# Altium PCB 100885.pcbdoc (part 1 of 3)
Units mm, origin at the board's own origin, x right, y up, seen from the top; angles counter-clockwise.
Board outline 292.21 x 226.73 mm, 2 copper layers (Top Layer, Bottom Layer), stack 0.091 mm thick; 33 components, 69 nets, 230 pads, 87 vias.
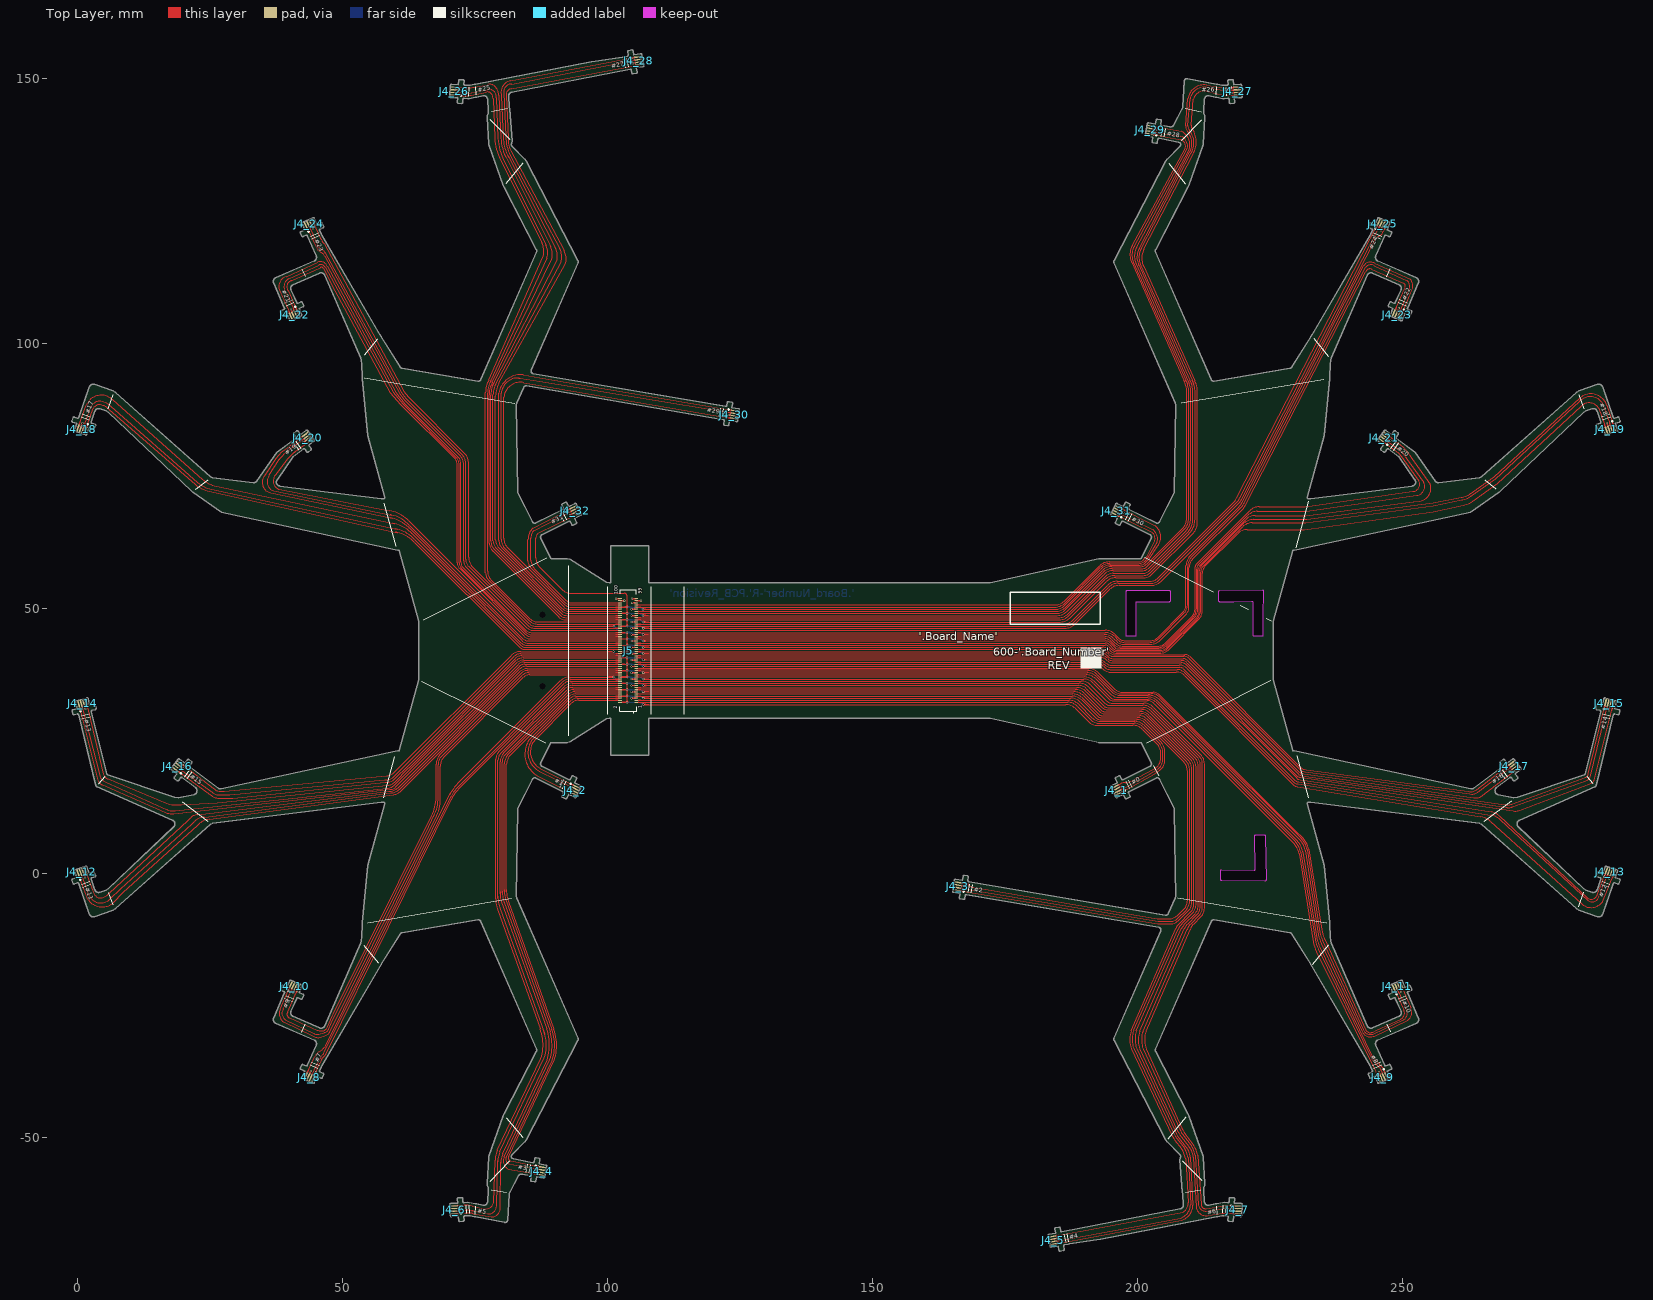
[diagram p0: Top Layer view]
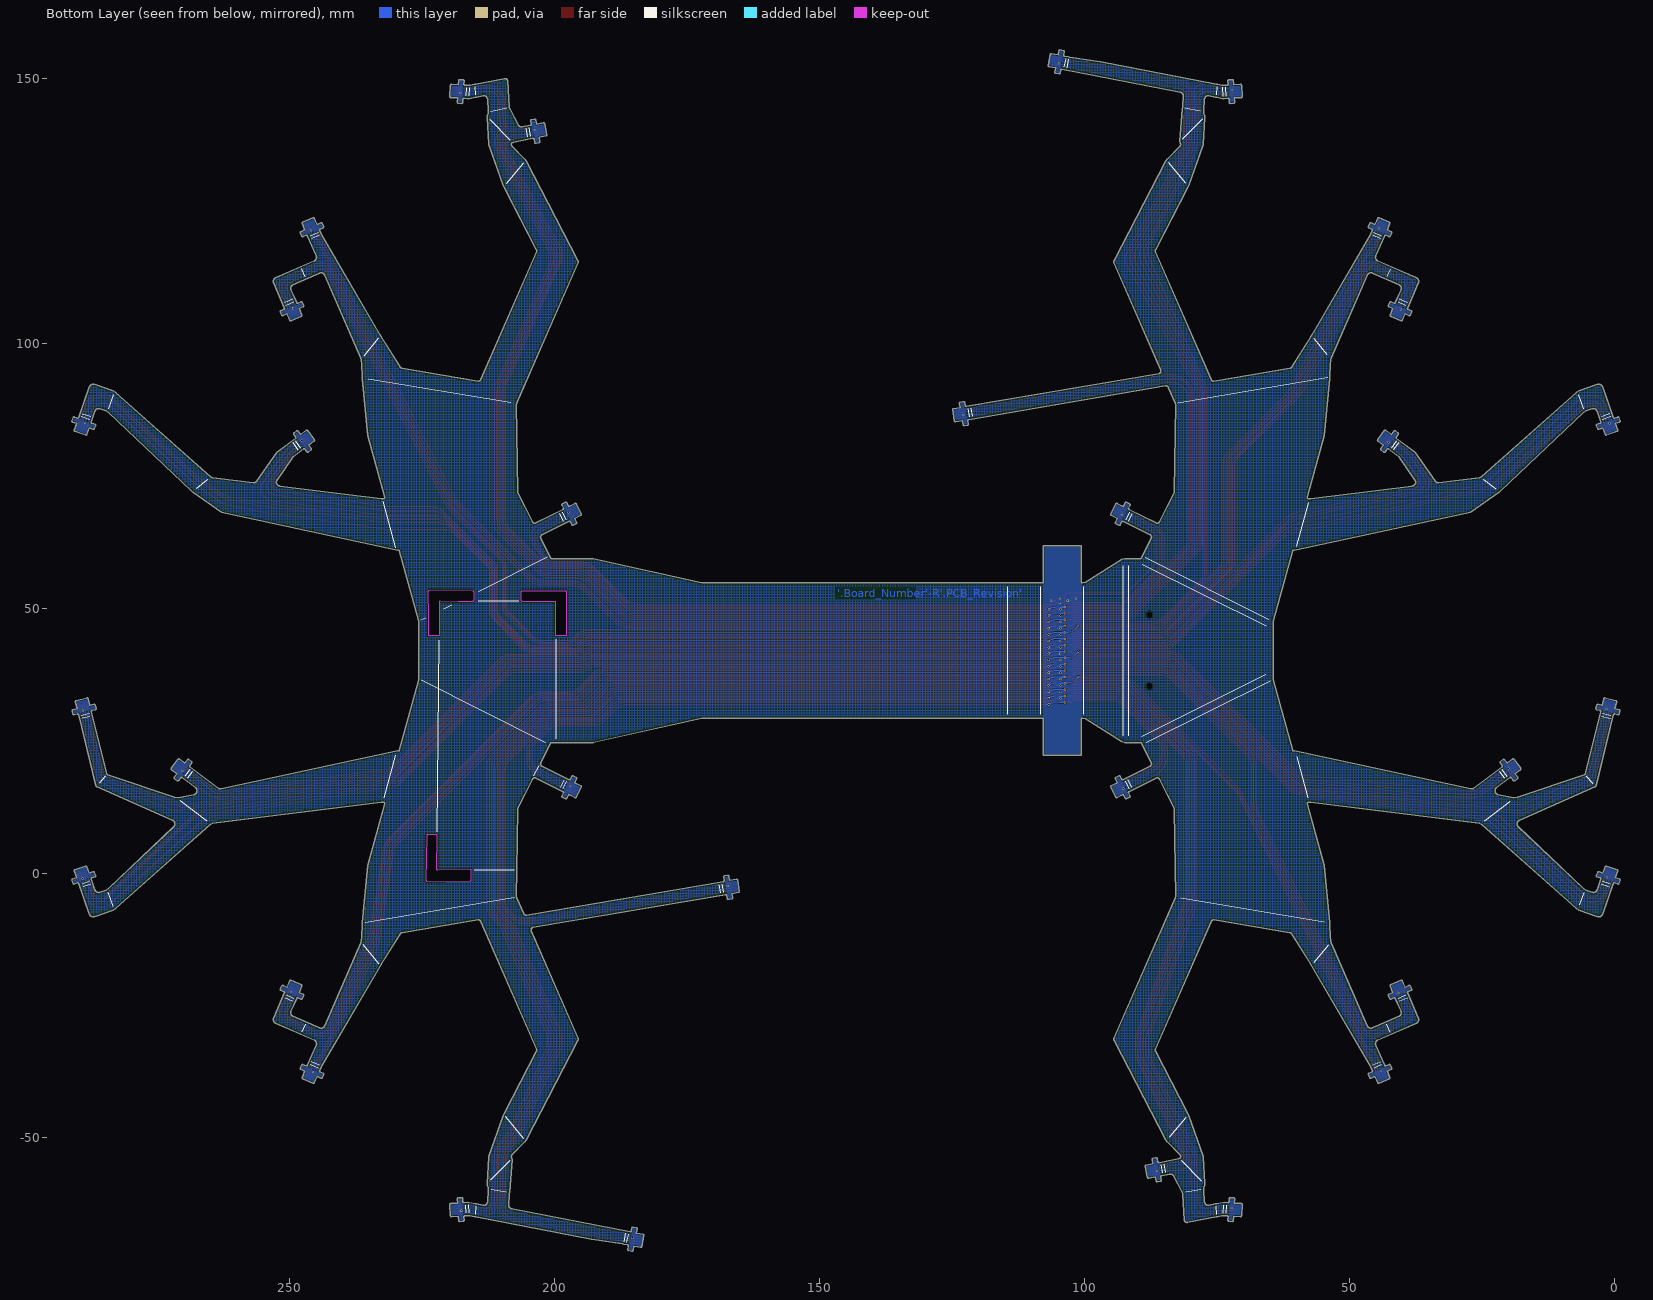
[diagram p1: Bottom Layer view, seen from below]

## Layer stack, top to bottom
Top Solder: solder mask 0.0102, Solder Resist, Dk 3.5
Top Layer: signal copper 0.0356
Dielectric 1: core 0.02, FR-4, Dk 4.2
Bottom Layer: signal copper 0.0356
Bottom Solder: solder mask 0.0102, Solder Resist, Dk 3.5

## Board outline
1384 vertices, not listed, extent -1.127,-71.353 291.087,155.374
cut-out: 197.765,44.961 ccw(c197.965,44.961) 197.965,44.761 199.565,44.761 ccw(c199.565,44.961) 199.765,44.961 199.765,51.061 cw(c199.965,51.061) 199.965,51.261 206.065,51.261 ccw(c206.065,51.461) 206.265,51.461 206.265,53.061 ccw(c206.065,53.061) 206.065,53.261 197.965,53.261 ccw(c197.965,53.061) 197.765,53.061
cut-out: 215.465,51.261 217.855,51.261 218.197,51.262 221.585,51.308 cw(c221.588,51.108) 221.788,51.105 221.766,49.478 221.765,49.305 221.765,44.961 ccw(c221.965,44.961) 221.965,44.761 223.565,44.761 ccw(c223.565,44.961) 223.765,44.961 223.765,48.305 223.766,48.478 223.829,53.187 ccw(c223.629,53.19) 223.626,53.39 215.468,53.279 ccw(c215.471,53.079) 215.271,53.082 215.266,52.728 215.265,52.555 215.265,51.461 ccw(c215.465,51.461)
cut-out: 215.698,-1.216 215.676,0.438 cw(c215.876,0.441) 215.879,0.641 222.013,0.558 ccw(c222.015,0.758) 222.215,0.76 222.132,7.027 cw(c222.332,7.03) 222.335,7.23 223.948,7.208 cw(c223.945,7.008) 224.145,7.011 224.256,-1.322 cw(c224.056,-1.324) 224.054,-1.524 215.896,-1.413 cw(c215.898,-1.213)

## Design rules (kind name [scope] priority, off if disabled: settings)
AssemblyTestPointUsage [All] p1 off:
AssemblyTestpoint [All] p1 off: testpointundercomponent=TRUE minsize=1.016 maxsize=2.54 preferedsize=1.524 minholesize=0 maxholesize=1.016 preferedholesize=0.813 testpointgrid=0.025 usegrid=TRUE gridtolerance=0 allowsidetop=TRUE allowsidebottom=TRUE
BoardOutlineClearance bottom_copper_regions [OnLayer('Bottom Layer')] p1: gap=0.25 except(0: Region-OutlineEdge Text-OutlineEdge)
BoardOutlineClearance silkscreen [(OnTopSilkscreen or OnBottomSilkscreen) and IsFree] p2: gap=0.3 except(0: Text-OutlineEdge)
BoardOutlineClearance Connectors [HasFootprint('WATCHMAN_CUSTOM_ZIF_4_PADS')] p3: gap=0
BoardOutlineClearance PSA [onlayer('PSA')] p4: gap=0
BoardOutlineClearance Stiffener [OnLayer('Stiffener')] p5: gap=0
BoardOutlineClearance Stiffener_1 [OnLayer('FAB_LOCATIONS')] p6: gap=0
BoardOutlineClearance BoardOutlineClearance_1 [All] p7: gap=0.25 except(0: Text-OutlineEdge)
Clearance Cutout [All vs OnLayer('PSA')] p1: gap=0
Clearance [All] p2: gap=0.125 except(0: Arc-Region Track-Region SMDPad-Region THPad-Region Via-Region Fill-Region Region-Region)
ComponentClearance [All] p1: gap=0.18 collisioncheckmode=3 verticalgap=0.18 showdistances=FALSE
FabricationTestPointUsage [All] p1 off: valid=0 allowmultiple=FALSE
FabricationTestpoint [All] p1 off: side=3 testpointundercomponent=TRUE minsize=1.016 maxsize=2.54 preferedsize=1.524 minholesize=0 maxholesize=1.016 preferedholesize=0.813 testpointgrid=0.025 allowsidetop=TRUE allowsidebottom=TRUE usegrid=TRUE gridtolerance=0
HoleSize [All] p1: absolutevalues=TRUE maxlimit=2.7 minlimit=0.025 maxpercent=80.000 minpercent=20.000
MinimumSolderMaskSliver MinimumSolderMaskSliver_1 [isvia vs IsPad] p1: minsoldermaskwidth=0
MinimumSolderMaskSliver [All] p2: minsoldermaskwidth=0.05
PlaneClearance [All] p1: clearance=0.2
PlaneConnect [All] p1: planeconnectstyle=Direct reliefexpansion=0.508 reliefentries=4 reliefconductorwidth=0.254 reliefairgap=0.254
PolygonConnect MTG [HasFootprint('MTG197RD102P')] p1: connectstyle=Direct reliefconductorwidth=0.25 reliefentries=4 polygonreliefangle="90 Angle" airgapwidth=0.125
PolygonConnect POLY_VIA [IsVia vs IsPolygon] p2: connectstyle=Direct reliefconductorwidth=0.254 reliefentries=4 polygonreliefangle="90 Angle" airgapwidth=0.254
PolygonConnect PolygonConnect_1 [All] p3: connectstyle=Relief reliefconductorwidth=0.25 reliefentries=4 polygonreliefangle="90 Angle" airgapwidth=0.125
RoomDefinition U_SensorConn432 [InComponentClass('U_SensorConn432')] p1: confinementstyle=ConfineIn formatcopy=TRUE lockcomponents=FALSE outline 145.778,432.283 155.778,432.283 155.778,446.283 145.778,446.283
RoomDefinition U_SensorConn431 [InComponentClass('U_SensorConn431')] p2: confinementstyle=ConfineIn formatcopy=TRUE lockcomponents=FALSE outline 145.778,417.283 154.778,417.283 154.778,431.283 145.778,431.283
RoomDefinition U_SensorConn430 [InComponentClass('U_SensorConn430')] p3: confinementstyle=ConfineIn formatcopy=TRUE lockcomponents=FALSE outline 145.778,401.283 155.778,401.283 155.778,415.283 145.778,415.283
RoomDefinition U_SensorConn429 [InComponentClass('U_SensorConn429')] p4: confinementstyle=ConfineIn formatcopy=TRUE lockcomponents=FALSE outline 145.778,386.283 155.778,386.283 155.778,400.283 145.778,400.283
RoomDefinition U_SensorConn428 [InComponentClass('U_SensorConn428')] p5: confinementstyle=ConfineIn formatcopy=TRUE lockcomponents=FALSE outline 145.778,371.283 155.778,371.283 155.778,385.283 145.778,385.283
RoomDefinition U_SensorConn427 [InComponentClass('U_SensorConn427')] p6: confinementstyle=ConfineIn formatcopy=TRUE lockcomponents=FALSE outline 145.778,356.283 155.778,356.283 155.778,370.283 145.778,370.283
RoomDefinition U_SensorConn426 [InComponentClass('U_SensorConn426')] p7: confinementstyle=ConfineIn formatcopy=TRUE lockcomponents=FALSE outline 145.778,340.283 155.778,340.283 155.778,354.283 145.778,354.283
RoomDefinition U_SensorConn425 [InComponentClass('U_SensorConn425')] p8: confinementstyle=ConfineIn formatcopy=TRUE lockcomponents=FALSE outline 145.778,325.283 155.778,325.283 155.778,339.283 145.778,339.283
RoomDefinition U_SensorConn324 [InComponentClass('U_SensorConn324')] p9: confinementstyle=ConfineIn formatcopy=TRUE lockcomponents=FALSE outline 145.778,310.283 155.778,310.283 155.778,324.283 145.778,324.283
RoomDefinition U_SensorConn323 [InComponentClass('U_SensorConn323')] p10: confinementstyle=ConfineIn formatcopy=TRUE lockcomponents=FALSE outline 145.778,295.283 155.778,295.283 155.778,309.283 145.778,309.283
RoomDefinition U_SensorConn321 [InComponentClass('U_SensorConn321')] p11: confinementstyle=ConfineIn formatcopy=TRUE lockcomponents=FALSE outline 145.778,264.283 154.778,264.283 154.778,278.283 145.778,278.283
RoomDefinition U_SensorConn320 [InComponentClass('U_SensorConn320')] p12: confinementstyle=ConfineIn formatcopy=TRUE lockcomponents=FALSE outline 145.778,249.283 155.778,249.283 155.778,263.283 145.778,263.283
RoomDefinition U_SensorConn319 [InComponentClass('U_SensorConn319')] p13: confinementstyle=ConfineIn formatcopy=TRUE lockcomponents=FALSE outline 145.778,234.283 155.778,234.283 155.778,248.283 145.778,248.283
RoomDefinition U_SensorConn318 [InComponentClass('U_SensorConn318')] p14: confinementstyle=ConfineIn formatcopy=TRUE lockcomponents=FALSE outline 145.778,218.283 155.778,218.283 155.778,232.283 145.778,232.283
RoomDefinition U_SensorConn317 [InComponentClass('U_SensorConn317')] p15: confinementstyle=ConfineIn formatcopy=TRUE lockcomponents=FALSE outline 145.778,203.283 155.778,203.283 155.778,217.283 145.778,217.283
RoomDefinition U_SensorConn216 [InComponentClass('U_SensorConn216')] p16: confinementstyle=ConfineIn formatcopy=TRUE lockcomponents=FALSE outline 145.778,188.283 155.778,188.283 155.778,202.283 145.778,202.283
RoomDefinition U_SensorConn215 [InComponentClass('U_SensorConn215')] p17: confinementstyle=ConfineIn formatcopy=TRUE lockcomponents=FALSE outline 145.778,172.283 155.778,172.283 155.778,186.283 145.778,186.283
RoomDefinition U_SensorConn214 [InComponentClass('U_SensorConn214')] p18: confinementstyle=ConfineIn formatcopy=TRUE lockcomponents=FALSE outline 145.778,157.283 155.778,157.283 155.778,171.283 145.778,171.283
RoomDefinition U_SensorConn213 [InComponentClass('U_SensorConn213')] p19: confinementstyle=ConfineIn formatcopy=TRUE lockcomponents=FALSE outline 145.778,142.283 155.778,142.283 155.778,156.283 145.778,156.283
RoomDefinition U_SensorConn212 [InComponentClass('U_SensorConn212')] p20: confinementstyle=ConfineIn formatcopy=TRUE lockcomponents=FALSE outline 145.778,127.283 155.778,127.283 155.778,141.283 145.778,141.283
RoomDefinition U_SensorConn211 [InComponentClass('U_SensorConn211')] p21: confinementstyle=ConfineIn formatcopy=TRUE lockcomponents=FALSE outline 145.778,111.283 154.778,111.283 154.778,125.283 145.778,125.283
RoomDefinition U_SensorConn210 [InComponentClass('U_SensorConn210')] p22: confinementstyle=ConfineIn formatcopy=TRUE lockcomponents=FALSE outline 145.778,96.283 155.778,96.283 155.778,110.283 145.778,110.283
RoomDefinition U_SensorConn29 [InComponentClass('U_SensorConn29')] p23: confinementstyle=ConfineIn formatcopy=TRUE lockcomponents=FALSE outline 145.778,81.283 153.778,81.283 153.778,95.283 145.778,95.283
RoomDefinition U_SensorConn18 [InComponentClass('U_SensorConn18')] p24: confinementstyle=ConfineIn formatcopy=TRUE lockcomponents=FALSE outline 145.778,66.283 153.778,66.283 153.778,80.283 145.778,80.283
RoomDefinition U_SensorConn17 [InComponentClass('U_SensorConn17')] p25: confinementstyle=ConfineIn formatcopy=TRUE lockcomponents=FALSE outline 145.778,50.283 153.778,50.283 153.778,64.283 145.778,64.283
RoomDefinition U_SensorConn16 [InComponentClass('U_SensorConn16')] p26: confinementstyle=ConfineIn formatcopy=TRUE lockcomponents=FALSE outline 145.778,35.283 153.778,35.283 153.778,49.283 145.778,49.283
RoomDefinition U_SensorConn15 [InComponentClass('U_SensorConn15')] p27: confinementstyle=ConfineIn formatcopy=TRUE lockcomponents=FALSE outline 145.778,20.283 153.778,20.283 153.778,34.283 145.778,34.283
RoomDefinition U_SensorConn14 [InComponentClass('U_SensorConn14')] p28: confinementstyle=ConfineIn formatcopy=TRUE lockcomponents=FALSE outline 145.778,4.283 153.778,4.283 153.778,18.283 145.778,18.283
RoomDefinition U_SensorConn13 [InComponentClass('U_SensorConn13')] p29: confinementstyle=ConfineIn formatcopy=TRUE lockcomponents=FALSE outline 145.778,-10.717 153.778,-10.717 153.778,3.283 145.778,3.283
RoomDefinition U_SensorConn12 [InComponentClass('U_SensorConn12')] p30: confinementstyle=ConfineIn formatcopy=TRUE lockcomponents=FALSE outline 145.778,-25.717 153.778,-25.717 153.778,-11.717 145.778,-11.717
RoomDefinition U_SensorConn11 [InComponentClass('U_SensorConn11')] p31: confinementstyle=ConfineIn formatcopy=TRUE lockcomponents=FALSE outline 145.778,-40.717 153.778,-40.717 153.778,-26.717 145.778,-26.717
RoomDefinition SensorBreakout [InComponentClass('SensorBreakout')] p32: confinementstyle=ConfineIn formatcopy=TRUE lockcomponents=FALSE outline 146.778,-69.717 154.778,-69.717 154.778,-42.717 146.778,-42.717
RoomDefinition U_SensorConn322 [InComponentClass('U_SensorConn322')] p33: confinementstyle=ConfineIn formatcopy=TRUE lockcomponents=FALSE outline 61.276,-72.114 144.793,-72.114 144.793,-50.118 61.276,-50.118
RoutingCorners [All] p1: cornerstyle=45-Degree minsetback=0 maxsetback=0
RoutingVias [All] p1: holewidth=0.23 width=0.4 viastyle="Through Hole" minholewidth=0.23 minwidth=0.4 maxholewidth=0.23 maxwidth=0.4
SilkToSilkClearance [All] p1 off: silktosilkclearance=0.05
SilkToSolderMaskClearance [IsPad] p1: minsilkscreentomaskgap=0.125 clearancetoexposedcopper=TRUE
SolderMaskExpansion [All] p1: expansion=0.05
Width PWR_GND [InNetClass('PWR_GND')] p1: maxlimit=0.25 minlimit=0.25 preferedwidth=0.25
Width CRITICAL [InNetClass('MOTOR_DRIVERS')] p2: maxlimit=0.4 minlimit=0.3 preferedwidth=0.4
Width [All] p3: maxlimit=0.5 minlimit=0.125 preferedwidth=0.125
18 further rules are at their usual default settings.

## Classes and differential pairs
channel class SensorConn: U_SensorConn11 U_SensorConn12 U_SensorConn13 U_SensorConn14 U_SensorConn15 U_SensorConn16 U_SensorConn17 U_SensorConn18 U_SensorConn29 U_SensorConn210 U_SensorConn211 U_SensorConn212 U_SensorConn213 U_SensorConn214 U_SensorConn215 U_SensorConn216 U_SensorConn317 U_SensorConn318 U_SensorConn319 U_SensorConn320 U_SensorConn321 U_SensorConn322 U_SensorConn323 U_SensorConn324 U_SensorConn425 U_SensorConn426 U_SensorConn427 U_SensorConn428 U_SensorConn429 U_SensorConn430 U_SensorConn431 U_SensorConn432
net class SENSOR_VCC[1..4]: SENSOR_VCC1 SENSOR_VCC2 SENSOR_VCC3 SENSOR_VCC4
component class U_SensorConn432: J4_32
component class U_SensorConn431: J4_31
component class U_SensorConn430: J4_30
component class U_SensorConn429: J4_29
component class U_SensorConn428: J4_28
component class U_SensorConn427: J4_27
component class U_SensorConn426: J4_26
component class U_SensorConn425: J4_25
component class U_SensorConn324: J4_24
component class U_SensorConn323: J4_23
component class U_SensorConn322: J4_22
component class U_SensorConn321: J4_21
component class U_SensorConn320: J4_20
component class U_SensorConn319: J4_19
component class U_SensorConn318: J4_18
component class U_SensorConn317: J4_17
component class U_SensorConn216: J4_16
component class U_SensorConn215: J4_15
component class U_SensorConn214: J4_14
component class U_SensorConn213: J4_13
component class U_SensorConn212: J4_12
component class U_SensorConn211: J4_11
component class U_SensorConn210: J4_10
component class U_SensorConn29: J4_9
component class U_SensorConn18: J4_8
component class U_SensorConn17: J4_7
component class U_SensorConn16: J4_6
component class U_SensorConn15: J4_5
component class U_SensorConn14: J4_4
component class U_SensorConn13: J4_3
component class U_SensorConn12: J4_2
component class U_SensorConn11: J4_1
component class SensorBreakout: J5
net class SENSOR_D[1..32]: SENSOR_D1 SENSOR_D2 SENSOR_D3 SENSOR_D4 SENSOR_D5 SENSOR_D6 SENSOR_D7 SENSOR_D8 SENSOR_D9 SENSOR_D10 SENSOR_D11 SENSOR_D12 SENSOR_D13 SENSOR_D14 SENSOR_D15 SENSOR_D16 SENSOR_D17 SENSOR_D18 SENSOR_D19 SENSOR_D20 SENSOR_D21 SENSOR_D22 SENSOR_D23 SENSOR_D24 SENSOR_D25 SENSOR_D26 SENSOR_D27 SENSOR_D28 SENSOR_D29 SENSOR_D30 SENSOR_D31 SENSOR_D32
net class SENSOR_E[1..32]: SENSOR_E1 SENSOR_E2 SENSOR_E3 SENSOR_E4 SENSOR_E5 SENSOR_E6 SENSOR_E7 SENSOR_E8 SENSOR_E9 SENSOR_E10 SENSOR_E11 SENSOR_E12 SENSOR_E13 SENSOR_E14 SENSOR_E15 SENSOR_E16 SENSOR_E17 SENSOR_E18 SENSOR_E19 SENSOR_E20 SENSOR_E21 SENSOR_E22 SENSOR_E23 SENSOR_E24 SENSOR_E25 SENSOR_E26 SENSOR_E27 SENSOR_E28 SENSOR_E29 SENSOR_E30 SENSOR_E31 SENSOR_E32

## Components (designator, comment, footprint, x,y, rotation, side; value= is the part's Value field where it differs from the comment)
J4_1 "SENSOR FPC TAB" WATCHMAN_CUSTOM_ZIF_4_PADS 195.424,15.294 r297 top (schematic designator J4)
J4_2 "SENSOR FPC TAB" WATCHMAN_CUSTOM_ZIF_4_PADS 94.536,15.294 r63.5 top (schematic designator J4)
J4_3 "SENSOR FPC TAB" WATCHMAN_CUSTOM_ZIF_4_PADS 165.262,-2.37 r260.5 top (schematic designator J4)
J4_4 "SENSOR FPC TAB" WATCHMAN_CUSTOM_ZIF_4_PADS 88.288,-56.393 r79 top (schematic designator J4)
J4_5 "SENSOR FPC TAB" WATCHMAN_CUSTOM_ZIF_4_PADS 183.317,-69.465 r281 top (schematic designator J4)
J4_6 "SENSOR FPC TAB" WATCHMAN_CUSTOM_ZIF_4_PADS 70.264,-63.621 r274 top (schematic designator J4)
J4_7 "SENSOR FPC TAB" WATCHMAN_CUSTOM_ZIF_4_PADS 219.696,-63.621 r86.5 top (schematic designator J4)
J4_8 "SENSOR FPC TAB" WATCHMAN_CUSTOM_ZIF_4_PADS 43.389,-39.251 r336 top (schematic designator J4)
J4_9 "SENSOR FPC TAB" WATCHMAN_CUSTOM_ZIF_4_PADS 246.571,-39.251 r23.5 top (schematic designator J4)
J4_10 "SENSOR FPC TAB" WATCHMAN_CUSTOM_ZIF_4_PADS 41.216,-20.667 r156 top (schematic designator J4)
J4_11 "SENSOR FPC TAB" WATCHMAN_CUSTOM_ZIF_4_PADS 248.744,-20.667 r204 top (schematic designator J4)
J4_12 "SENSOR FPC TAB" WATCHMAN_CUSTOM_ZIF_4_PADS 0.446,0.98 r199.5 top (schematic designator J4)
J4_13 "SENSOR FPC TAB" WATCHMAN_CUSTOM_ZIF_4_PADS 289.514,0.98 r160 top (schematic designator J4)
J4_14 "SENSOR FPC TAB" WATCHMAN_CUSTOM_ZIF_4_PADS 0.696,32.8 r194 top (schematic designator J4)
J4_15 "SENSOR FPC TAB" WATCHMAN_CUSTOM_ZIF_4_PADS 289.265,32.8 r166 top (schematic designator J4)
J4_16 "SENSOR FPC TAB" WATCHMAN_CUSTOM_ZIF_4_PADS 18.249,20.65 r233 top (schematic designator J4)
J4_17 "SENSOR FPC TAB" WATCHMAN_CUSTOM_ZIF_4_PADS 271.711,20.65 r127 top (schematic designator J4)
J4_18 "SENSOR FPC TAB" WATCHMAN_CUSTOM_ZIF_4_PADS 0.446,83.041 r340 top (schematic designator J4)
J4_19 "SENSOR FPC TAB" WATCHMAN_CUSTOM_ZIF_4_PADS 289.514,83.041 r19 top (schematic designator J4)
J4_20 "SENSOR FPC TAB" WATCHMAN_CUSTOM_ZIF_4_PADS 43.991,82.665 r127 top (schematic designator J4)
J4_21 "SENSOR FPC TAB" WATCHMAN_CUSTOM_ZIF_4_PADS 245.969,82.665 r233 top (schematic designator J4)
J4_22 "SENSOR FPC TAB" WATCHMAN_CUSTOM_ZIF_4_PADS 41.216,104.689 r23.5 top (schematic designator J4)
J4_23 "SENSOR FPC TAB" WATCHMAN_CUSTOM_ZIF_4_PADS 248.744,104.689 r336 top (schematic designator J4)
J4_24 "SENSOR FPC TAB" WATCHMAN_CUSTOM_ZIF_4_PADS 43.389,123.272 r204 top (schematic designator J4)
J4_25 "SENSOR FPC TAB" WATCHMAN_CUSTOM_ZIF_4_PADS 246.571,123.272 r156 top (schematic designator J4)
J4_26 "SENSOR FPC TAB" WATCHMAN_CUSTOM_ZIF_4_PADS 70.264,147.643 r266.5 top (schematic designator J4)
J4_27 "SENSOR FPC TAB" WATCHMAN_CUSTOM_ZIF_4_PADS 219.696,147.643 r93.5 top (schematic designator J4)
J4_28 "SENSOR FPC TAB" WATCHMAN_CUSTOM_ZIF_4_PADS 106.644,153.486 r101 top (schematic designator J4)
J4_29 "SENSOR FPC TAB" WATCHMAN_CUSTOM_ZIF_4_PADS 201.672,140.414 r259 top (schematic designator J4)
J4_30 "SENSOR FPC TAB" WATCHMAN_CUSTOM_ZIF_4_PADS 124.698,86.391 r80 top (schematic designator J4)
J4_31 "SENSOR FPC TAB" WATCHMAN_CUSTOM_ZIF_4_PADS 195.424,68.727 r243.5 top (schematic designator J4)
J4_32 "SENSOR FPC TAB" WATCHMAN_CUSTOM_ZIF_4_PADS 94.536,68.727 r116.5 top (schematic designator J4)
J5 "DF40HC(3.0)-100DS-0.4V" con100_hirose-df40c-100ds_129h 103.869,42.011 r270 top locked

## Footprints (in the part's own frame and the unit in brackets; to place one, negate y for a bottom-side part, rotate by r counter-clockwise, add the part's x,y. Pads: shape width x height; smd on the part's side, far side on the other; paste and mask are expansions set on the pad)
con100_hirose-df40c-100ds_129h [mm] "CONN RCPT 100POS 0.4MM SMD GOLD"
  rect 0.2x0.7 smd mask+0.1: 1(9.8,1.54) 2(9.8,-1.54) 3(9.4,1.54) 4(9.4,-1.54) 5(9,1.54) 6(9,-1.54) 7(8.6,1.54) 8(8.6,-1.54) 9(8.2,1.54) 10(8.2,-1.54) 11(7.8,1.54) 12(7.8,-1.54) 13(7.4,1.54) 14(7.4,-1.54) 15(7,1.54) 16(7,-1.54) 17(6.6,1.54) 18(6.6,-1.54) 19(6.2,1.54) 20(6.2,-1.54) 21(5.8,1.54) 22(5.8,-1.54) 23(5.4,1.54) 24(5.4,-1.54) 25(5,1.54) 26(5,-1.54) 27(4.6,1.54) 28(4.6,-1.54) 29(4.2,1.54) 30(4.2,-1.54) 31(3.8,1.54) 32(3.8,-1.54) 33(3.4,1.54) 34(3.4,-1.54) 35(3,1.54) 36(3,-1.54) 37(2.6,1.54) 38(2.6,-1.54) 39(2.2,1.54) 40(2.2,-1.54) 41(1.8,1.54) 42(1.8,-1.54) 43(1.4,1.54) 44(1.4,-1.54) 45(1,1.54) 46(1,-1.54) 47(0.6,1.54) 48(0.6,-1.54) 49(0.2,1.54) 50(0.2,-1.54) 51(-0.2,1.54) 52(-0.2,-1.54) 53(-0.6,1.54) 54(-0.6,-1.54) 55(-1,1.54) 56(-1,-1.54) 57(-1.4,1.54) 58(-1.4,-1.54) 59(-1.8,1.54) 60(-1.8,-1.54) 61(-2.2,1.54) 62(-2.2,-1.54) 63(-2.6,1.54) 64(-2.6,-1.54) 65(-3,1.54) 66(-3,-1.54) 67(-3.4,1.54) 68(-3.4,-1.54) 69(-3.8,1.54) 70(-3.8,-1.54) 71(-4.2,1.54) 72(-4.2,-1.54) 73(-4.6,1.54) 74(-4.6,-1.54) 75(-5,1.54) 76(-5,-1.54) 77(-5.4,1.54) 78(-5.4,-1.54) 79(-5.8,1.54) 80(-5.8,-1.54) 81(-6.2,1.54) 82(-6.2,-1.54) 83(-6.6,1.54) 84(-6.6,-1.54) 85(-7,1.54) 86(-7,-1.54) 87(-7.4,1.54) 88(-7.4,-1.54) 89(-7.8,1.54) 90(-7.8,-1.54) 91(-8.2,1.54) 92(-8.2,-1.54) 93(-8.6,1.54) 94(-8.6,-1.54) 95(-9,1.54) 96(-9,-1.54) 97(-9.4,1.54) 98(-9.4,-1.54) 99(-9.8,1.54) 100(-9.8,-1.54)
  silkscreen extent -11.43,-1.57 11.81,1.61, body extent -11.4,-1.52 11.4,1.52, height 1.29
WATCHMAN_CUSTOM_ZIF_4_PADS [mm] "ROBIN_CUSTOM_ZIF_PADS"
  rect 0.3x1.5 smd paste-10 mask-5: 1(0.75,0.775) 2(0.25,0.775) 3(-0.25,0.775) 4(-0.75,0.775)
  silkscreen extent 0.61,1.97 0.83,2.2

## Part data
J4_1 J4_2 J4_3 J4_4 J4_5 J4_6 J4_7 J4_8 J4_9 J4_10 J4_11 J4_12 J4_13 J4_14 J4_15 J4_16 J4_17 J4_18 J4_19 J4_20 J4_21 J4_22 J4_23 J4_24 J4_25 J4_26 J4_27 J4_28 J4_29 J4_30 J4_31 J4_32: library part Watchman_Sensor_FPC_Tab, "WATCHMAN SENSOR FPC TABS"
J5: library part DF40HC(3.0)-100DS-0.4V(51), "CONN RCPT 100POS 0.4MM SMD GOLD 3.0MM"

## Free pads (board coordinates)
  round 1 hole 1.2 unplated: 0(87.695,35.261) 0(87.695,48.761)

## Via types
v1: diameter 0.4, hole 0.23, Top Layer to Bottom Layer, tented both sides, 87 vias

## Nets (pads, with @x,y where several pads share a name; then routed paths per layer and width w, separated by ;. In a path a pad name is that pad's centre, name@x,y a point inside that pad or via, vN(x,y) a via of type N, cw(c..) or ccw(c..) an arc to the next point about the centre after c; other vN are vias at no path point)
GND: J4_1.3 J4_2.3 J4_3.3 J4_4.3 J4_5.3 J4_6.3 J4_7.3 J4_8.3 J4_9.3 J4_10.3 J4_11.3 J4_12.3 J4_13.3 J4_14.3 J4_15.3 J4_16.3 J4_17.3 J4_18.3 J4_19.3 J4_20.3 J4_21.3 J4_22.3 J4_23.3 J4_24.3 J4_25.3 J4_26.3 J4_27.3 J4_28.3 J4_29.3 J4_30.3 J4_31.3 J4_32.3 J5.5 J5.11 J5.17 J5.23 J5.29 J5.35 J5.41 J5.47 J5.53 J5.59 J5.65 J5.71 J5.77 J5.83 J5.89 J5.95 J5.97 J5.98 J5.99 J5.100 | length 57.1
  Top Layer w0.125: J4_18.3@0.476,83.855 v1(0.866,84.905) ; J4_12.3@0.941,0.333 v1(1.362,-0.802) ; J4_14.3@1.126,32.109 v1(1.415,30.953) ; J4_16.3@19.019,20.383 J4_16.3@19.041,20.368 ; J4_16.3@19.022,20.387 J4_16.3@19.041,20.368 ; v1(19.965,19.735) J4_16.3@19.041,20.368 ; v1(40.22,106.351) 40.672,105.297 J4_22.3@40.673,105.295 ; v1(40.64,-22.608) J4_10.3@41.13,-21.477 ; v1(42.584,81.313) J4_20.3@43.522,81.999 ; J4_8.3@43.476,-38.441 v1(43.973,-37.348) ; J4_24.3@43.932,122.666 v1(44.401,121.64) ; J4_6.3@71.02,-63.319 J4_6.3@71.02,-63.318 ; J4_6.3@71.02,-63.318 J4_6.3@71.02,-63.318 ; J4_26.3@71.053,147.845 v1(72.147,147.78) ; v1(72.259,-63.215) J4_6.3@71.02,-63.318 ; v1(86.285,-56.252) J4_4.3@87.479,-56.49 ; J4_4.3@87.376,-56.472 J4_4.3@87.479,-56.492 ; v1(92.657,15.943) J4_2.3@93.718,15.423 ; v1(92.865,67.609) 93.957,68.151 J4_32.3@93.959,68.152 ; J4_2.3@93.729,15.412 J4_2.3@93.718,15.423 ; J4_2.3@93.731,15.416 J4_2.3@93.718,15.423 ; v1(101.583,51.791) 101.603,51.811 J5.100@102.329,51.811 ; J5.98@102.329,51.411 103.11,51.411 v1(103.115,51.416) ; v1(104.46,45.011) J5.65@105.409,45.011 ; v1(104.465,48.611) J5.83@105.409,48.611 ; v1(104.466,43.816) 104.471,43.811 J5.59@105.409,43.811 ; v1(104.47,37.811) J5.29@105.409,37.811 ; v1(104.47,49.811) J5.89@105.409,49.811 ; v1(104.471,34.211) J5.11@105.409,34.211 ; v1(104.491,35.411) J5.17@105.409,35.411 ; v1(104.51,36.611) J5.23@105.409,36.611 ; v1(104.51,42.611) J5.53@105.409,42.611 ; v1(104.51,46.211) J5.71@105.409,46.211 ; v1(104.51,33.011) J5.5@105.409,33.011 ; v1(104.512,38.991) cw(c104.56,38.943) 104.56,39.011 J5.35@105.409,39.011 ; v1(104.512,47.391) cw(c104.56,47.343) 104.56,47.411 J5.77@105.409,47.411 ; v1(104.515,40.211) J5.41@105.409,40.211 ; v1(104.56,41.411) J5.47@105.409,41.411 ; v1(104.604,51.811) J5.99@105.409,51.811 ; v1(104.615,51.011) J5.95@105.409,51.011 ; v1(104.753,152.853) J4_28.3@105.93,153.093 ; J5.97@105.409,51.411 106.285,51.411 v1(106.29,51.416) ; J4_3.3@166.068,-2.251 J4_3.3@166.07,-2.252 ; J4_3.3@166.068,-2.25 J4_3.3@166.07,-2.252 ; v1(167.3,-2.457) J4_3.3@166.07,-2.252 ; J4_5.3@184.03,-69.072 J4_5.3@184.055,-69.067 ; J4_5.3@184.033,-69.089 J4_5.3@184.055,-69.067 ; v1(185.286,-68.844) J4_5.3@184.055,-69.067 ; J4_1.3@196.001,15.869 v1(197.086,16.436) ; J4_31.3@196.229,68.605 J4_31.3@196.249,68.596 ; J4_31.3@196.233,68.612 J4_31.3@196.249,68.596 ; v1(197.336,68.098) J4_31.3@196.249,68.596 ; J4_29.3@202.481,140.511 J4_29.3@202.483,140.511 ; J4_29.3@202.481,140.513 J4_29.3@202.483,140.511 ; v1(203.732,140.283) J4_29.3@202.483,140.511 ; v1(217.603,-63.737) J4_7.3@218.907,-63.824 ; v1(217.795,147.264) J4_27.3@218.938,147.346 ; J4_7.3@218.814,-63.819 J4_7.3@218.907,-63.824 ; v1(245.578,-37.518) J4_9.3@246.01,-38.584 ; v1(245.973,121.296) J4_25.3@246.484,122.462 ; J4_9.3@246.033,-38.64 J4_9.3@246.01,-38.584 ; J4_9.3@246.056,-38.63 246.055,-38.628 J4_9.3@246.01,-38.584 ; J4_21.3@246.739,82.398 v1(247.719,81.67) ; J4_21.3@246.741,82.401 J4_21.3@246.859,82.312 ; J4_23.3@248.827,105.5 J4_23.3@248.835,105.508 ; J4_23.3@248.831,105.498 J4_23.3@248.835,105.508 ; J4_11.3@249.287,-21.274 v1(249.771,-22.417) ; v1(249.325,106.615) J4_23.3@248.835,105.508 ; v1(270.264,19.264) J4_17.3@271.21,19.96 ; J4_17.3@271.239,19.989 J4_17.3@271.21,19.96 ; J4_17.3@271.242,19.984 J4_17.3@271.21,19.96 ; v1(288.587,84.929) J4_19.3@289.025,83.692 ; v1(289.007,30.718) J4_15.3@289.319,31.985 ; v1(289.037,-1.034) J4_13.3@289.484,0.166 ; J4_15.3@289.32,31.988 J4_15.3@289.319,31.985 ; J4_15.3@289.321,31.987 J4_15.3@289.319,31.985
  Top Layer w0.2: v1(122.791,86.472) J4_30.3@123.891,86.28
SENSOR_D1: J4_1.1 J5.3 | length 116.7
  Top Layer w0.125: J5.3@105.409,32.613 187.074,32.613 cw(c187.074,30.073) 188.87,31.869 191.374,29.365 ccw(c193.17,31.161) 193.17,28.621 199.494,28.621 cw(c199.494,26.081) 201.29,27.877 204.446,24.721 cw(c202.65,22.925) 205.19,22.925 205.19,21.354 cw(c202.849,21.354) 204.505,19.7 ; J4_1.1@196.439,14.969 J4_1.1@196.455,14.978 203.247,18.779 ccw(c199.173,25.663) 204.504,19.699
SENSOR_D2: J4_2.1 J5.4 | length 33.1
  Top Layer w0.125: 86.187,25.082 ccw(c88.858,22.874) 87.338,19.76 ; 86.188,25.082 93.151,32.046 ; 87.34,19.741 93.797,16.502 J4_2.1@94.177,16.311 ; 93.152,32.046 cw(c94.515,30.682) 94.515,32.611 J5.4@102.329,32.611
SENSOR_D3: J4_3.1 J5.9 | length 183
  Top Layer w0.125: J5.9@105.409,33.813 187.79,33.813 cw(c187.79,31.273) 189.586,33.069 192.615,30.041 ccw(c193.52,30.946) 193.52,29.666 200.44,29.666 cw(c200.44,27.835) 201.734,29.13 209.594,21.27 cw(c208.029,19.704) 210.243,19.704 210.243,-5.609 cw(c208.197,-5.609) 209.644,-7.055 207.727,-8.972 cw(c206.214,-7.458) 206.214,-9.599 203.865,-9.599 167.084,-3.435 J4_3.1@165.903,-3.236
SENSOR_D4: J4_4.1 J5.10 | length 112.4
  Top Layer w0.125: 80.89,-3.184 ccw(c86.751,-3.331) 80.89,-3.478 ; 81.242,-5.345 89.848,-29.459 cw(c81.066,-32.525) 89.907,-35.415 ; 81.245,-5.345 cw(c86.751,-3.331) 80.89,-3.478 ; 81.313,-53.546 ccw(c81.801,-53.802) 81.673,-54.339 J4_4.1@87.67,-55.509 ; 81.314,-53.547 89.935,-35.359 ; J5.10@102.329,33.811 93.932,33.811 ccw(c93.932,32.089) 92.715,33.306 81.524,22.116 ccw(c83.055,20.585) 80.89,20.585 80.89,-3.478
SENSOR_D5: J4_5.1 J5.15 | length 229.3
  Top Layer w0.125: J5.15@105.409,35.013 188.515,35.013 cw(c188.515,32.473) 190.311,34.269 193.365,31.216 ccw(c194.27,32.121) 194.27,30.841 200.84,30.841 cw(c200.84,28.715) 202.342,30.219 210.87,21.691 cw(c209.489,20.309) 211.443,20.309 211.443,-6.234 cw(c209.439,-6.234) 210.856,-7.65 ; J4_5.1@184.222,-70.06 208.228,-65.536 ; 199.809,-29.781 208.282,-10.501 cw(c211.908,-12.363) 208.965,-9.542 210.856,-7.651 ; 199.815,-29.784 ccw(c204.667,-31.466) 199.822,-33.168 ; 199.846,-33.234 cw(c204.667,-31.466) 199.822,-33.168 ; 207.041,-48.659 ccw(c213.45,-45.711) 207.089,-48.763 ; 208.246,-65.533 208.228,-65.536 ; 209.108,-51.584 cw(c205.754,-54.232) 209.14,-51.625 ; 209.987,-53.65 ccw(c205.754,-54.232) 209.14,-51.625 ; 209.99,-53.65 210.438,-62.688 cw(c207.533,-62.716) 208.228,-65.536 ; 199.822,-33.168 207.089,-48.763 ; 207.089,-48.763 ccw(c213.45,-45.711) 207.799,-49.934 209.14,-51.625
SENSOR_D6: J4_6.1 J5.16 | length 127.4
  Top Layer w0.125: J4_6.1@71.09,-64.317 73.215,-64.173 cw(c73.441,-70.221) 74.407,-64.246 ; 74.666,-64.294 ccw(c73.441,-70.221) 74.634,-64.287 ; 79.69,-3.559 ccw(c85.551,-3.706) 79.69,-3.853 ; 79.811,-54.799 cw(c84.079,-54.766) 79.816,-54.559 ; 80.045,-5.72 cw(c85.551,-3.706) 79.945,-5.424 ; 88.496,-29.384 cw(c79.714,-32.45) 88.556,-35.34 ; 88.496,-29.384 79.945,-5.424 ; 88.571,-35.323 80.224,-52.934 ; J5.16@102.329,35.011 93.39,35.011 ccw(c93.39,33.398) 92.25,34.539 80.402,22.691 ccw(c82.122,20.971) 80.401,22.69 ccw(c82.122,20.971) 79.69,20.971 79.69,-3.853 ; 74.407,-64.246 cw(c73.441,-70.221) 74.634,-64.287 ; 74.407,-64.246 74.634,-64.287 ; 74.634,-64.287 78.015,-64.9 ccw(c78.003,-63.122) 79.757,-63.418 79.816,-54.559 ; 79.69,-3.853 ccw(c85.551,-3.706) 79.945,-5.424 ; 79.816,-54.559 cw(c84.079,-54.766) 80.22,-52.942 ; 80.22,-52.942 cw(c84.079,-54.766) 80.224,-52.934 ; 80.22,-52.942 80.224,-52.934
SENSOR_D7: J4_7.1 J5.21 | length 209.7
  Top Layer w0.125: J5.21@105.409,36.219 189.374,36.219 cw(c189.374,33.679) 191.17,35.475 194.104,32.541 ccw(c195.25,33.688) 195.25,32.066 201.148,32.066 cw(c201.148,29.526) 202.944,31.322 211.932,22.333 cw(c210.205,20.606) 212.648,20.606 212.648,-6.615 cw(c210.358,-6.615) 211.978,-8.233 cw(c210.358,-6.615) 211.977,-8.234 210.69,-9.521 ccw(c213.633,-12.342) 209.92,-10.659 201.613,-29.81 ccw(c206.465,-31.491) 201.644,-33.259 208.36,-48.134 ccw(c214.77,-45.186) 209.118,-49.409 210.537,-51.287 ; 210.49,-51.225 cw(c207.104,-53.831) 210.537,-51.287 ; 211.338,-53.257 ccw(c207.104,-53.831) 210.537,-51.287 ; 211.343,-53.257 212.015,-62.62 ccw(c212.817,-62.533) 212.955,-63.329 ; 212.965,-63.334 216.29,-62.761 216.928,-62.727 J4_7.1@218.968,-62.835
SENSOR_D8: J4_8.1 J5.22 | length 100.1
  Top Layer w0.125: J4_8.1@44.382,-38.845 45.665,-35.869 cw(c49.736,-37.463) 46.382,-34.659 ccw(c45.338,-33.301) 46.872,-34.063 70.462,13.832 cw(c78.022,10.069) 71.905,15.891 91.719,35.705 ; 91.72,35.706 cw(c92.94,34.484) 92.94,36.211 J5.22@102.329,36.211
SENSOR_D9: J4_9.1 J5.27 | length 185.6
  Top Layer w0.125: J5.27@105.409,37.413 190.282,37.413 cw(c190.282,34.873) 192.078,36.669 195.04,33.707 ccw(c196.273,34.941) 196.273,33.197 201.982,33.197 cw(c201.982,30.657) 203.778,32.453 230.115,6.116 cw(c227.132,3.208) 231.213,4.046 233.857,-12.284 ccw(c241.131,-10.945) 234.407,-14.026 ; 234.406,-14.027 244.036,-34.122 ; J4_9.1@246.963,-38.243 246.96,-38.236 246.49,-37.145 ccw(c245.008,-37.61) 246.37,-36.862 ccw(c245.008,-37.61) 246.227,-36.647 245.019,-35.45 cw(c248.01,-32.209) 244.036,-34.122 ; 244.036,-34.122 cw(c248.412,-32.025) 244.026,-34.101 ccw(c248.01,-32.209) 244.036,-34.122
SENSOR_D10: J4_10.1 J5.28 | length 114.9
  Top Layer w0.125: 38.809,-28.073 cw(c39.947,-26.485) 38.807,-28.071 ; 38.809,-28.074 38.807,-28.071 ; 38.815,-28.084 44.505,-30.834 ccw(c45.248,-29.603) 45.786,-30.937 46.64,-30.682 ccw(c46.301,-29.284) 47.549,-29.999 67.761,10.822 ; J4_10.1@40.216,-21.07 38.165,-25.684 ccw(c39.947,-26.485) 38.807,-28.071 ; 67.568,10.422 ccw(c60.934,13.855) 67.761,10.822 ; J5.28@102.329,37.411 85.323,37.411 ccw(c85.323,35.551) 84.008,36.867 69.143,22.002 ccw(c70.939,20.205) 68.399,20.205 68.399,14.13 ; 67.761,10.822 ccw(c60.934,13.855) 68.399,13.58 ; 68.399,13.58 ccw(c60.934,13.855) 68.399,14.13 ; 68.399,13.58 68.399,14.13
SENSOR_D11: J4_11.1 J5.33 | length 279
  Top Layer w0.125: J5.33@105.409,38.611 190.767,38.611 cw(c190.767,36.098) 192.544,37.875 ; J5.33@105.409,38.619 190.748,38.619 ; 190.921,38.619 190.748,38.619 ; 229.783,8.021 204.196,33.609 ccw(c202.976,32.389) 202.976,34.114 197.357,34.114 cw(c197.357,36.654) 195.561,34.858 192.544,37.875 ; 229.784,8.022 231.165,6.641 ; 232.339,4.491 ccw(c228.257,3.658) 231.24,6.566 ; 232.348,4.493 233.765,-4.414 234.762,-10.684 ccw(c242.037,-9.345) 235.255,-12.298 ; 235.313,-12.426 cw(c242.037,-9.345) 235.255,-12.298 ; 244.394,-30.022 245.085,-29.699 249.693,-27.549 ; 244.405,-30.024 cw(c243.953,-29.055) 243.046,-29.622 235.255,-12.298 ; J4_11.1@248.386,-21.675 250.252,-25.766 cw(c249.102,-26.382) 250.34,-25.972 cw(c249.102,-26.382) 250.395,-26.21 cw(c249.102,-26.382) 250.152,-27.157 cw(c249.102,-26.382) 249.692,-27.546 ; 190.748,38.619 cw(c190.748,36.079) 192.544,37.875 ; 231.165,6.641 cw(c228.257,3.658) 231.24,6.566 ; 231.165,6.641 231.24,6.566
SENSOR_D12: J4_12.1 J5.34 | length 122.5
  Top Layer w0.125: J4_12.1@0,0 0.565,-1.602 1.449,-4.097 ccw(c4.629,-3.062) 4.011,-6.348 4.846,-6.348 ccw(c4.846,-3.808) 6.642,-5.605 8.59,-3.656 22.655,9.041 22.992,9.378 cw(c24.788,7.582) 23.382,9.697 cw(c24.788,7.582) 24.086,10.023 cw(c24.788,7.582) 24.788,10.122 24.815,10.122 59.49,14.826 ccw(c59.49,16.71) 59.992,14.894 ccw(c59.49,16.71) 60.822,15.378 83.5,38.056 ; 83.5,38.056 cw(c84.84,36.716) 84.84,38.611 J5.34@102.329,38.611
SENSOR_D13: J4_13.1 J5.39 | length 202.5
  Top Layer w0.125: J5.39@105.384,39.819 192.813,39.819 cw(c192.813,38.614) 193.665,39.466 193.694,39.436 ccw(c195.215,40.957) 195.215,38.807 208.018,38.807 cw(c208.018,37.814) 208.719,38.517 ; 208.72,38.516 229.711,17.525 ccw(c230.44,18.255) 230.126,17.272 230.44,17.223 266.765,11.568 cw(c266.313,8.74) 268.257,10.843 284.846,-4.611 ccw(c285.644,-3.726) 286.758,-4.148 ; 286.748,-4.152 J4_13.1@288.502,0.399
SENSOR_D14: J4_14.1 J5.40 | length 124.9
  Top Layer w0.125: J4_14.1@0.161,31.868 3.765,17.516 ccw(c5.278,18.168) 3.771,17.502 ccw(c5.278,18.168) 4.243,16.886 ccw(c5.278,18.168) 4.688,16.63 16.515,11.458 ccw(c17.93,14.767) 18.124,11.173 ; 18.125,11.164 58.89,15.816 ccw(c58.89,17.408) 60.015,16.282 62.824,19.091 62.838,19.091 83.093,39.346 cw(c84.215,38.225) 84.215,39.811 J5.40@102.329,39.811
SENSOR_D15: J4_15.1 J5.45 | length 204.7
  Top Layer w0.125: J5.45@105.379,41.013 193.224,41.013 cw(c193.224,39.4) 194.365,40.541 ccw(c195.451,41.627) 195.451,40.091 208.296,40.091 cw(c208.296,38.509) 209.414,39.628 ; 209.415,39.627 230.333,18.709 ccw(c231.037,19.412) 230.756,18.458 231.037,18.418 269.44,12.88 ; 270.616,13.006 cw(c269.816,14.925) 270.579,12.991 ; 284.552,18.09 ccw(c284.132,19.046) 284.615,18.121 ; 285.122,18.716 cw(c284.132,19.046) 284.615,18.121 ; 285.122,18.716 J4_15.1@288.357,32.228 ; 269.44,12.88 ccw(c269.816,14.925) 269.598,12.857 ; 269.44,12.88 269.598,12.857 ; 269.598,12.857 ccw(c269.816,14.925) 270.479,12.954 ; 270.479,12.954 ccw(c269.816,14.925) 270.579,12.991 ; 270.479,12.954 270.579,12.991 ; 270.579,12.991 284.615,18.121
SENSOR_D16: J4_16.1 J5.46 | length 95.5
  Top Layer w0.125: J4_16.1@18.421,19.591 19.019,19.148 24.993,14.816 ccw(c26.604,16.427) 25.573,14.395 ccw(c26.604,16.427) 26.604,14.148 29.19,14.148 58.035,17.115 58.099,17.115 ccw(c58.099,19.655) 58.673,17.181 ccw(c58.099,19.655) 59.895,17.859 62.327,20.291 62.341,20.291 82.525,40.474 cw(c83.819,39.18) 83.819,41.011 J5.46@102.329,41.011
SENSOR_D17: J4_17.1 J5.51 | length 176.4
  Top Layer w0.125: J5.51@105.409,42.213 193.364,42.213 cw(c193.364,40.515) 194.565,41.716 ccw(c195.745,42.895) 195.745,41.227 208.907,41.227 cw(c208.907,39.767) 209.939,40.8 ; 209.94,40.8 230.755,19.984 ccw(c231.883,21.112) 231.463,19.573 231.883,19.517 262.473,15.417 ccw(c262.904,17.173) 263.992,15.729 J4_17.1@270.641,20.783
SENSOR_D18: J4_18.1 J5.52 | length 120.2
  Top Layer w0.125: J4_18.1@1.416,83.513 2.945,87.747 cw(c3.95,87.25) 3.941,88.371 ; 3.941,88.371 cw(c3.941,85.651) 5.865,87.575 22.147,73.393 ccw(c25.857,77.624) 24.83,72.091 59.89,64.376 ; 63.528,62.441 ccw(c58.689,57.731) 60.389,64.266 ; 63.534,62.448 83.263,42.72 83.358,42.624 ccw(c84.356,43.622) 84.356,42.211 J5.52@102.329,42.211 ; 59.89,64.376 cw(c58.689,57.731) 60.388,64.266 ; 59.89,64.376 60.388,64.266
SENSOR_D19: J4_19.1 J5.57 | length 212.2
  Top Layer w0.125: J5.57@105.409,43.413 193.94,43.413 cw(c193.94,42.268) 194.75,43.078 195.465,42.363 ccw(c196.242,43.139) 196.242,42.041 204.065,42.041 ccw(c204.065,44.325) 205.679,42.709 ; 205.68,42.71 210.97,48 ; 210.971,48.001 ccw(c209.28,49.691) 211.671,49.691 211.671,57.07 cw(c212.937,57.07) 212.041,57.966 220.073,65.997 cw(c221.869,64.201) 221.869,66.741 231.965,66.741 255.84,69.866 261.115,70.9 ; 262.914,71.669 cw(c260.414,75.027) 262.668,71.499 ; 283.556,89.761 267.29,74.766 262.668,71.499 ; 283.557,89.76 cw(c285.557,87.235) 288.609,88.266 J4_19.1@289.981,84.021 ; 261.115,70.9 ccw(c260.414,75.027) 261.322,70.94 ; 261.115,70.9 261.322,70.94 ; 261.322,70.94 ccw(c260.414,75.027) 262.668,71.499
SENSOR_D20: J4_20.1 J5.58 | length 91.6
  Top Layer w0.125: 35.251,75.043 ccw(c36.825,73.752) 36.359,71.771 ; 35.253,75.041 37.483,78.341 cw(c43.269,74.099) 38.978,79.849 J4_20.1@42.922,82.796 ; 36.407,71.757 58.936,67.041 ; 62.574,65.106 ccw(c57.735,60.396) 62.421,65.259 ; J5.58@102.329,43.411 85.024,43.411 cw(c85.024,45.233) 83.736,43.943 cw(c85.024,45.233) 83.735,43.944 70.399,57.28 62.421,65.259 ; 58.936,67.041 cw(c57.735,60.396) 59.301,66.965 ; 58.936,67.041 59.301,66.965 ; 59.301,66.965 cw(c57.735,60.396) 62.421,65.259
SENSOR_D21: J4_21.1 J5.63 | length 176.3
  Top Layer w0.125: J5.63@105.409,44.613 193.94,44.613 cw(c193.94,43.038) 195.054,44.152 195.69,43.516 ccw(c197.38,45.206) 197.38,42.816 203.715,42.816 ccw(c203.715,45.17) 205.379,43.504 ; 205.379,43.505 210.152,48.278 ccw(c208.356,50.074) 210.896,50.074 210.896,57.792 cw(c211.644,57.792) 211.115,58.321 221.191,68.397 cw(c222.987,66.601) 222.987,69.141 231.665,69.141 251.922,72.038 ; J4_21.1@246.136,81.599 249.183,79.298 249.745,78.713 253.09,74.091 cw(c251.898,73.417) 251.928,72.048
SENSOR_D22: J4_22.1 J5.64 | length 114.3
  Top Layer w0.125: 40.265,111.854 ccw(c40.749,110.631) 40.227,111.838 ; J4_22.1@41.579,105.698 41.581,105.704 J4_22.1@41.587,105.718 ; J4_22.1@41.595,105.698 J4_22.1@41.587,105.718 ; 71.19,78.166 60.931,88.425 58.878,90.722 48.5,109.916 46.301,114.175 ccw(c45.963,113.927) 45.715,114.266 40.227,111.838 ; 71.19,78.165 cw(c70.202,77.178) 71.599,77.178 71.599,58.541 ccw(c73.07,58.541) 72.029,57.502 ; 72.03,57.501 84.415,45.116 ccw(c85.635,46.336) 85.635,44.611 J5.64@102.329,44.611 ; 40.208,111.83 cw(c40.749,110.631) 40.227,111.838 ; 40.208,111.83 ccw(c40.749,110.631) 39.615,109.966 39.666,109.947 40.587,107.955 J4_22.1@41.587,105.718 ; 40.208,111.83 40.227,111.838
SENSOR_D23: J4_23.1 J5.69 | length 198.6
  Top Layer w0.125: J5.69@105.409,45.811 193.933,45.811 cw(c193.933,43.298) 195.71,45.075 196.39,44.395 ccw(c197.666,45.671) 197.666,43.866 202.34,43.866 ccw(c202.34,45.918) 203.791,44.467 208.665,49.341 ccw(c207.488,50.517) 209.152,50.517 209.152,58.054 cw(c211.692,58.054) 209.896,59.85 219.139,69.092 ; 219.105,69.053 ccw(c215.872,71.869) 219.139,69.092 ; 219.657,69.855 cw(c215.872,71.869) 219.635,69.815 ; J4_23.1@249.744,105.091 251.79,109.966 ccw(c250.135,110.785) 251.634,111.862 251.634,111.865 251.364,112.135 244.825,115.066 ccw(c243.985,113.772) 242.739,114.681 219.635,69.815 ; 219.139,69.092 ccw(c215.872,71.869) 219.635,69.814
SENSOR_D24: J4_24.1 J5.70 | length 108.4
  Top Layer w0.125: J4_24.1@43.019,122.259 43.849,120.491 44.196,119.764 45.065,117.938 ; 45.04,117.988 ccw(c46.519,118.702) 45.065,117.938 ; 45.731,117.256 cw(c45.136,115.725) 45.772,117.239 ; 45.923,117.171 cw(c46.519,118.702) 45.883,117.188 ; 73.306,57.768 84.728,46.345 ; 73.305,57.769 cw(c74.529,58.991) 72.799,58.991 72.799,77.123 ccw(c70.37,77.123) 72.088,78.841 61.583,89.346 60.759,90.508 46.615,116.436 46.615,116.439 ccw(c45.136,115.725) 45.883,117.188 ; 84.729,46.344 ccw(c86.019,47.635) 86.019,45.811 J5.70@102.329,45.811 ; 45.065,117.938 ccw(c46.519,118.702) 45.772,117.239 ; 45.772,117.239 ccw(c46.519,118.702) 45.883,117.188 ; 45.772,117.239 cw(c45.136,115.725) 45.883,117.188
SENSOR_D25: J4_25.1 J5.75 | length 181.6
  Top Layer w0.125: J5.75@105.409,47.003 186.012,47.003 ccw(c186.012,49.543) 187.808,47.747 194.395,54.334 cw(c196.191,52.538) 196.191,55.078 202.34,55.078 ccw(c202.34,57.369) 203.96,55.749 218.167,69.957 ; 218.184,69.973 218.167,69.957 ; J4_25.1@245.571,122.869 218.763,70.808 cw(c214.978,72.822) 218.167,69.957
SENSOR_D26: J4_26.1 J5.76 | length 132.2
  Top Layer w0.125: J4_26.1@70.992,146.848 72.552,146.756 72.939,146.733 ccw(c73.225,152.595) 74.289,146.823 77.097,147.42 ; 76.94,147.386 cw(c77.27,146.217) 77.097,147.42 ; 77.55,93.051 ccw(c81.892,90.65) 77.549,93.05 ; 79.664,134.898 cw(c88.066,139.092) 79.544,135.146 ; 85.165,47.666 77.49,55.341 cw(c78.842,56.693) 76.93,56.693 76.93,90.666 cw(c81.892,90.65) 77.186,92.225 cw(c81.892,90.65) 77.549,93.05 ; 85.165,47.665 ccw(c86.747,49.248) 86.747,47.011 J5.76@102.329,47.011 ; 87.812,116.426 ccw(c84.642,117.42) 87.568,118.992 79.544,135.146 ; 87.814,116.425 77.549,93.05 ; 77.097,147.42 cw(c77.27,146.217) 77.729,147.342 77.94,147.205 cw(c76.879,146.144) 78.374,146.27 cw(c76.879,146.144) 78.379,146.144 78.379,146.141 78.685,138.666 ccw(c88.066,139.092) 79.544,135.146
SENSOR_D27: J4_27.1 J5.81 | length 209.5
  Top Layer w0.125: J5.81@105.334,48.219 185.101,48.219 ccw(c185.101,50.759) 186.897,48.962 193.82,55.886 ; 193.821,55.886 cw(c195.468,54.238) 195.468,56.569 200.917,56.569 ccw(c200.917,58.509) 202.289,57.136 ; 200.242,114.693 cw(c203.482,116.241) 200.096,115.046 ; 202.29,57.137 209.376,64.223 ccw(c206.784,66.814) 210.449,66.814 210.449,90.766 ; 209.893,93.016 cw(c206.118,90.895) 210.222,92.277 ; 210.446,90.766 ccw(c206.118,90.895) 210.222,92.277 ; J4_27.1@218.878,148.328 216.901,148.176 216.179,148.203 213.04,148.735 ccw(c212.567,145.668) 209.501,146.141 209.06,141.041 ccw(c210.739,141.041) 209.552,139.854 cw(c206.681,137.715) 209.896,136.141 200.293,117.891 ccw(c203.482,116.241) 200.096,115.046 ; 200.096,115.046 209.893,93.016 210.222,92.277
SENSOR_D28: J4_28.1 J5.82 | length 149.1
  Top Layer w0.125: 78.396,92.283 ccw(c82.889,90.175) 77.927,90.216 77.927,62.741 ccw(c80.262,62.741) 78.611,61.089 90.915,48.785 ccw(c92.301,50.171) 92.301,48.211 J5.82@102.329,48.211 ; 78.546,92.576 ccw(c82.889,90.175) 78.396,92.283 90.358,115.5 ; 80.327,138.474 ccw(c87.742,138.811) 80.33,138.414 ; 81.045,135.609 cw(c87.742,138.811) 80.33,138.414 ; 81.054,135.613 81.224,135.258 ; 81.293,135.115 cw(c89.696,139.308) 81.224,135.258 ; 90.351,115.475 ccw(c87.181,116.468) 90.358,115.5 ; J4_28.1@105.74,154.074 81.617,149.541 ccw(c82.157,147.286) 81.138,149.369 ccw(c81.939,147.477) 79.958,148.021 ccw(c82.157,147.286) 79.846,147.47 79.878,146.857 80.33,138.414 ; 81.224,135.258 90.107,118.041 ; 90.107,118.041 cw(c87.181,116.468) 90.158,117.942 ; 90.107,118.041 90.158,117.942 ; 90.158,117.942 cw(c87.181,116.468) 90.358,115.5
SENSOR_D29: J4_29.1 J5.87 | length 194.3
  Top Layer w0.125: J5.87@105.409,49.411 105.442,49.378 184.55,49.378 ccw(c184.55,51.918) 186.346,50.122 193.321,57.097 cw(c195.117,55.301) 195.117,57.841 200.487,57.841 ccw(c200.487,59.719) 201.814,58.39 ; 198.914,115.205 cw(c202.153,116.753) 198.892,115.253 ; 201.815,58.391 208.542,65.118 ccw(c206.746,66.914) 209.286,66.914 209.286,90.766 ccw(c204.957,90.895) 208.733,93.016 198.892,115.253 ; J4_29.1@202.291,139.535 208.14,138.417 cw(c207.739,137.142) 209.015,136.741 198.965,118.403 ccw(c202.153,116.753) 198.85,115.348 ; 198.85,115.348 ccw(c202.153,116.753) 198.892,115.253 ; 198.85,115.348 198.892,115.253
SENSOR_D30: J4_30.1 J5.88 | length 103.5
  Top Layer w0.125: 91.365,50.016 80.077,61.303 cw(c81.626,62.852) 79.436,62.852 79.436,90.616 cw(c83.594,89.833) 84.04,94.041 87.22,93.525 J4_30.1@124.064,87.259 ; 91.366,50.015 ccw(c92.826,51.477) 92.826,49.411 J5.88@102.329,49.411
SENSOR_D31: J4_31.1 J5.93 | length 112.7
  Top Layer w0.125: J5.93@105.409,50.611 184.408,50.611 ccw(c184.408,53.151) 186.204,51.355 192.834,57.985 cw(c194.63,56.189) 194.63,58.729 200.09,58.729 ccw(c200.09,60.331) 201.222,59.198 ; J4_31.1@195.786,67.716 202.74,64.3 cw(c201.86,63.12) 203.04,62.241 201.815,59.791 201.223,59.198
SENSOR_D32: J4_32.1 J5.94 | length 36.2
  Top Layer w0.125: J4_32.1@93.505,69.043 93.499,69.04 85.857,65.127 ccw(c88.059,62.925) 84.945,62.925 84.945,58.941 ccw(c86.949,58.941) 85.532,57.524 91.836,51.22 ccw(c93.306,52.69) 93.306,50.611 J5.94@102.329,50.611
SENSOR_E1: J4_1.2 J5.1 | length 115.7
  Top Layer w0.125: J5.1@105.409,32.216 186.854,32.216 cw(c186.854,29.676) 188.65,31.472 191.112,29.01 ccw(c192.908,30.806) 192.908,28.266 199.415,28.266 cw(c199.415,26.036) 200.992,27.613 204.048,24.556 cw(c202.252,22.76) 204.792,22.76 204.792,21.472 cw(c202.565,21.472) 204.225,19.988 ; J4_1.2@196.201,15.373 196.243,15.396 202.382,18.722 202.99,19.087 ccw(c198.916,25.971) 204.225,19.988 ; 204.247,20.007 cw(c198.916,25.971) 204.225,19.988
SENSOR_E2: J4_2.2 J5.6 | length 34.3
  Top Layer w0.125: 85.923,25.375 ccw(c88.886,22.777) 87.09,19.269 ; 85.923,25.383 93.023,32.483 cw(c94.296,31.209) 94.296,33.011 J5.6@102.329,33.011 ; J4_2.2@93.954,15.864 93.288,16.194 87.096,19.266 ; 87.09,19.269 ccw(c88.886,22.777) 87.096,19.266 ; 87.09,19.269 87.096,19.266
SENSOR_E3: J4_3.2 J5.7 | length 181.5
  Top Layer w0.125: J5.7@105.409,33.419 187.638,33.419 cw(c187.638,30.879) 189.434,32.675 192.49,29.618 ccw(c193.16,30.288) 193.16,29.341 199.913,29.341 cw(c199.913,26.801) 201.709,28.597 209.104,21.202 cw(c207.308,19.406) 209.848,19.406 209.848,-5.318 cw(c207.493,-5.318) 209.159,-6.982 ; J4_3.2@165.986,-2.743 167.295,-2.964 203.955,-9.104 206.114,-9.104 ccw(c206.114,-6.874) 207.69,-8.451 209.158,-6.983
SENSOR_E4: J4_4.2 J5.12 | length 114.1
  Top Layer w0.125: 80.49,-3.134 ccw(c86.351,-3.281) 80.49,-3.428 ; 80.845,-5.295 cw(c86.351,-3.281) 80.77,-5.077 ; 81.17,22.328 ccw(c82.816,20.684) 80.49,20.684 80.49,-3.428 ; 81.171,22.329 92.55,33.707 ; 81.415,-54.859 82.315,-55.009 J4_4.2@87.575,-55.999 ; 81.416,-54.855 cw(c81.555,-54.07) 80.858,-53.681 89.527,-35.392 ; 89.522,-35.39 ccw(c80.68,-32.5) 89.462,-29.434 80.77,-5.077 ; 92.551,33.708 cw(c93.765,32.493) 93.765,34.211 J5.12@102.329,34.211 ; 80.49,-3.428 ccw(c86.351,-3.281) 80.77,-5.077
SENSOR_E5: J4_5.2 J5.13 | length 228.1
  Top Layer w0.125: J5.13@105.409,34.613 188.24,34.613 cw(c188.24,32.073) 190.036,33.869 193.19,30.716 ccw(c193.773,31.299) 193.773,30.474 200.469,30.474 cw(c200.469,27.934) 202.265,29.73 210.422,21.573 cw(c208.925,20.076) 210.423,21.572 cw(c208.925,20.076) 211.043,20.076 211.043,-6.059 cw(c209.016,-6.059) 210.449,-7.492 208.44,-9.501 ccw(c211.383,-12.322) 207.67,-10.639 ; J4_5.2@184.127,-69.571 208.083,-65.106 ccw(c207.283,-62.472) 210.032,-62.625 209.567,-53.734 ccw(c205.333,-54.309) 208.88,-51.926 207.415,-50.061 cw(c213.066,-45.838) 206.703,-48.884 ; 199.286,-33.159 cw(c204.107,-31.391) 199.25,-33.058 ; 206.657,-48.786 ccw(c213.066,-45.838) 206.665,-48.803 ; 207.666,-10.637 199.255,-29.709 ccw(c204.107,-31.391) 199.25,-33.058 ; 199.25,-33.058 206.665,-48.803 ; 206.665,-48.803 ccw(c213.066,-45.838) 206.703,-48.884 ; 206.665,-48.803 206.703,-48.884